# Altium PCB PDB_first.PcbDoc
Units mm, origin at the board's own origin, x right, y up, seen from the top; angles counter-clockwise.
Board outline 170.31 x 111.51 mm, 2 copper layers (Top Layer, Bottom Layer); 59 components, 41 nets, 170 pads, 167 vias.
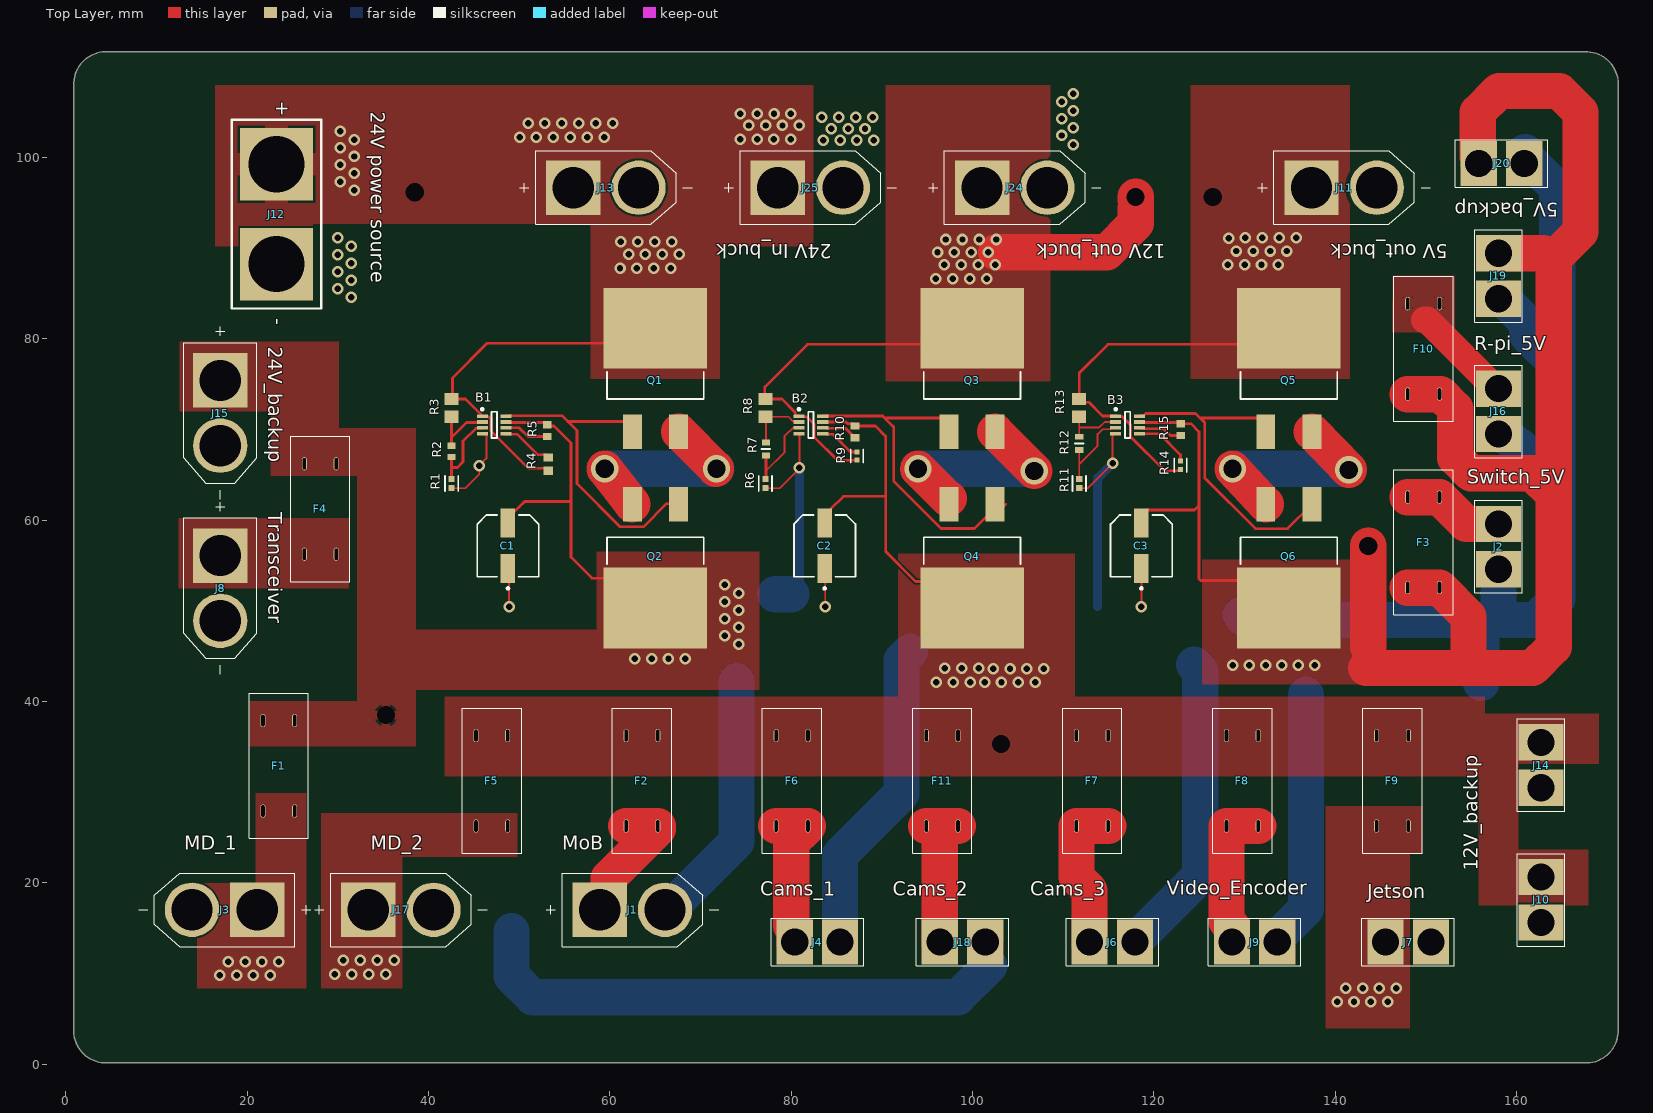
[diagram p0: Top Layer view]
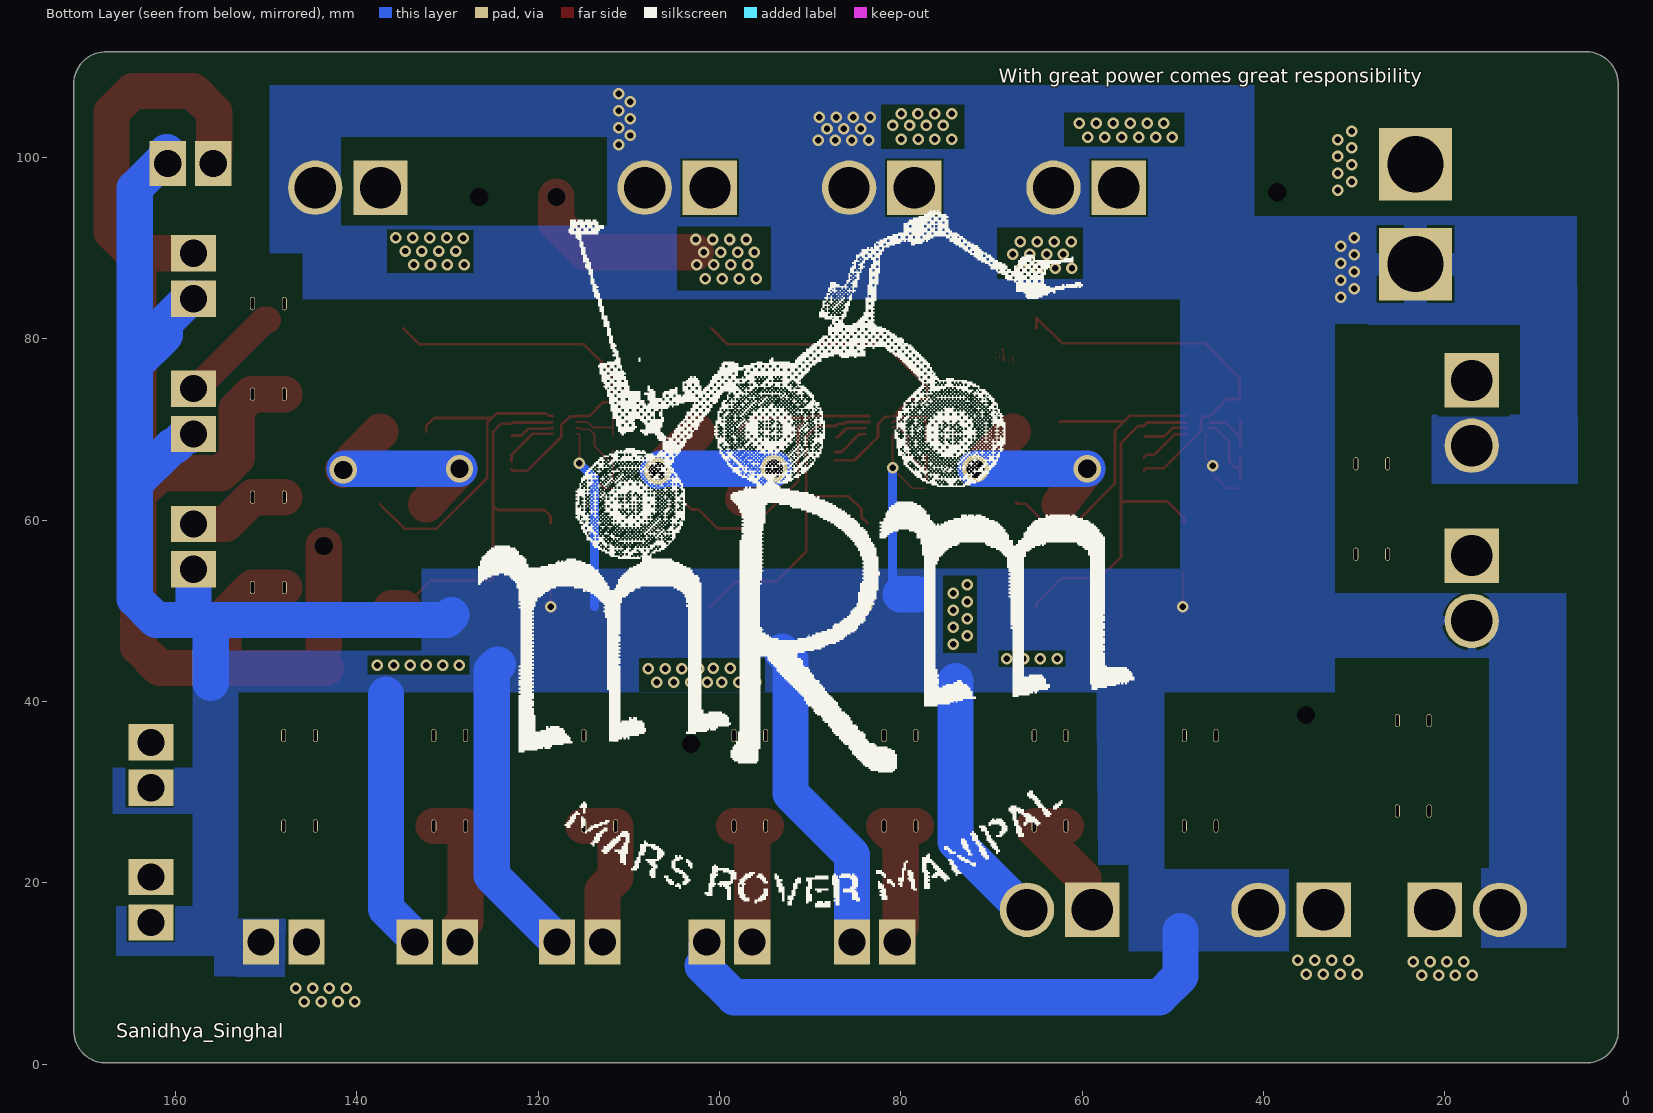
[diagram p1: Bottom Layer view, seen from below]
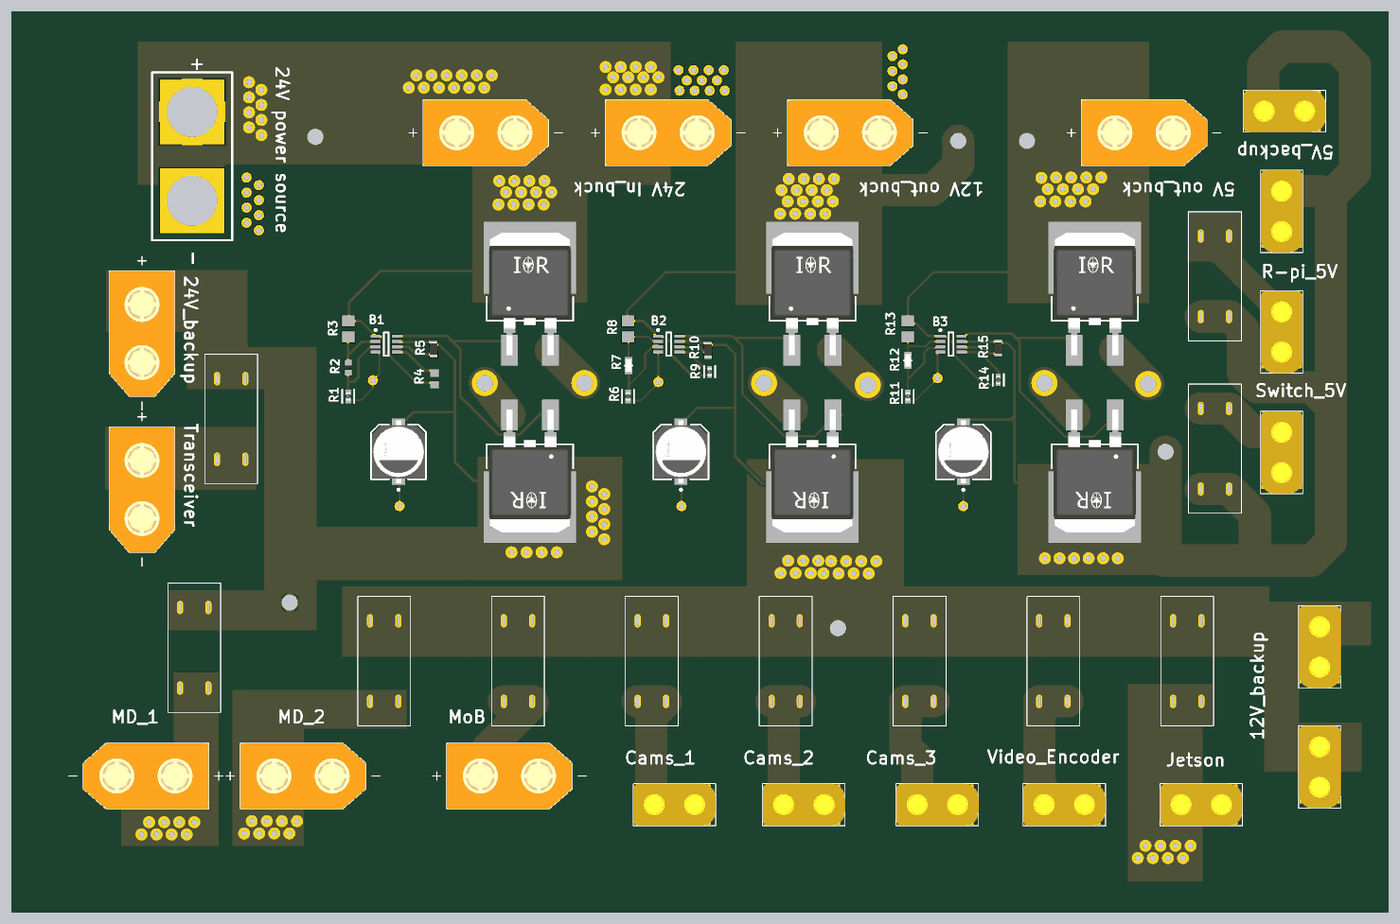
[diagram p2: 3D render of the assembled board from above, using the file's embedded part models]

## Layer stack, top to bottom
Top Solder: solder mask 0.0102, Solder Resist, Dk 3.5
Top Layer: signal copper 0.0356
Dielectric 1: dielectric 0.32, FR-4, Dk 4.8
Bottom Layer: signal copper 0.0356
Bottom Solder: solder mask 0.0102, Solder Resist, Dk 3.5

## Board outline
0.887,3.554 ccw(c4.443,3.681) 4.259,0.127 167.894,0.127 167.769,0.129 ccw(c167.642,3.685) 171.196,3.502 171.196,108.331 171.198,108.206 ccw(c167.642,108.079) 167.826,111.633 4.318,111.633 ccw(c4.445,108.077) 0.891,108.261 0.887,108.256

## Design rules (kind name [scope] priority, off if disabled: settings)
Clearance [All] p1: gap=0.2 ignorepadtopadclearanceinfootprint=FALSE
PlaneClearance [All] p1: clearance=2
PlaneConnect [All] p1: planeconnectstyle=Direct reliefexpansion=0.508 reliefentries=4 reliefconductorwidth=0.254 reliefairgap=1
PolygonConnect [All] p1: connectstyle=Direct reliefconductorwidth=1 reliefentries=4 polygonreliefangle="90 Angle" airgapwidth=0.254
RoutingTopology [All] p1: topology=Daisy_Balanced
RoutingVias [All] p1: holewidth=0.711 width=1.27 viastyle="Through Hole" minholewidth=0.711 minwidth=1.27 maxholewidth=0.711 maxwidth=1.27
SolderMaskExpansion [All] p1: expansion=0.102 istentingtop=FALSE
SupplyNets "Schematic Supply Nets_2" [InNet('VCC')] p1: voltage=0.000
SupplyNets "Schematic Supply Nets_1" [InNet('+5')] p2: voltage=0.000
SupplyNets "Schematic Supply Nets_3" [InNet('+12')] p3: voltage=0.000
SupplyNets "Schematic Supply Nets" [InNet('GND')] p4: voltage=0.000
Width [All] p1: maxlimit=20 minlimit=0.05 preferedwidth=5 minimp=50.000000 maximp=50.000000 favimp=50.000000
27 further rules are at their usual default settings.

## Classes and differential pairs
component class PDB_first: B1 B2 B3 C1 C2 C3 F1 F2 F3 F4 F5 F6 F7 F8 F9 F10 F11 F? J1 J2 J3 J4 J6 J7 J8 J9 J10 J11 J12 J14 J15 J16 J17 J18 J19 J20 J24 J25 Q1 Q2 Q3 Q4 Q5 Q6 R1 R3 R4 R5 R6 R8 R9 R10 R11 R13 R14 R15

## Components (designator, comment, footprint, x,y, rotation, side; value= is the part's Value field where it differs from the comment)
B1 "LTC4365ITS8#TRMPBF" LT-TS8-8-TSOT-23_V 47.245,70.485 r0 top
B2 "LTC4365ITS8#TRMPBF" LT-TS8-8-TSOT-23_V 82.17,70.485 r0 top
B3 "LTC4365ITS8#TRMPBF" LT-TS8-8-TSOT-23_V 117.094,70.485 r0 top
C1 "EEEFT1V101AP" FP-FTD-MFG 48.769,57.15 r90 top
C2 "EEEFT1V101AP" FP-FTD-MFG 83.694,57.15 r90 top
C3 "EEEFT1V101AP" FP-FTD-MFG 118.618,57.15 r90 top
F1 "MicroBladeFuseHolder" Fuse 23.495,32.893 r0 top
F2 "MicroBladeFuseHolder" Fuse 63.542,31.242 r0 top
F3 "MicroBladeFuseHolder" Fuse 149.733,57.531 r180 top
F4 "MicroBladeFuseHolder" Fuse 28.067,61.214 r0 top
F5 "MicroBladeFuseHolder" Fuse 46.99,31.242 r0 top
F6 "MicroBladeFuseHolder" Fuse 80.095,31.242 r0 top
F7 "MicroBladeFuseHolder" Fuse 113.199,31.242 r0 top
F8 "MicroBladeFuseHolder" Fuse 129.752,31.242 r0 top
F9 "MicroBladeFuseHolder" Fuse 146.304,31.242 r0 top
F10 "MicroBladeFuseHolder" Fuse 149.733,78.867 r180 top
F11 "MicroBladeFuseHolder" Fuse 96.647,31.242 r0 top
J1 "XT60-M" AMASS_XT60-M#1 62.484,17.018 r0 top
J2 "XT30PB" XT30PB 157.988,59.563 r0 top
J3 "XT60-M" AMASS_XT60-M#1 17.526,17.018 r180 top
J4 "XT30PB" XT30PB 80.391,13.462 r90 top
J6 "XT30PB" XT30PB 112.903,13.462 r90 top
J7 "XT30PB" XT30PB 145.542,13.462 r90 top
J8 "XT60-M" AMASS_XT60-M#1 17.039,52.478 r270 top
J9 "XT30PB" XT30PB 128.604,13.462 r90 top
J10 "XT30PB" XT30PB 162.687,20.621 r0 top
J11 "XT60-M" AMASS_XT60-M#1 140.97,96.647 r0 top
J12 "xt90" xt90 23.241,93.726 r270 top
J13 "XT60-M" AMASS_XT60-M#1 59.563,96.647 r0 top
J14 "XT30PB" XT30PB 162.687,35.48 r0 top
J15 "XT60-M" AMASS_XT60-M#1 17.039,71.795 r270 top
J16 "XT30PB" XT30PB 157.988,74.486 r0 top
J17 "XT60-M" AMASS_XT60-M#1 36.957,17.018 r0 top
J18 "XT30PB" XT30PB 96.393,13.462 r90 top
J19 "XT30PB" XT30PB 157.988,89.408 r0 top
J20 "XT30PB" XT30PB 155.829,99.314 r90 top
J24 "XT60-M" AMASS_XT60-M#1 104.648,96.647 r0 top
J25 "XT60-M" AMASS_XT60-M#2 82.105,96.647 r0 top
Q1 "IRLZ44NSTRLPBF" FP-PG-TO263-3-MFG 65.024,76.708 r0 top
Q2 "IRLZ44NSTRLPBF" FP-PG-TO263-3-MFG 65.024,54.737 r180 top
Q3 "IRLZ44NSTRLPBF" FP-PG-TO263-3-MFG 99.949,76.708 r0 top
Q4 "IRLZ44NSTRLPBF" FP-PG-TO263-3-MFG 99.949,54.737 r180 top
Q5 "IRLZ44NSTRLPBF" FP-PG-TO263-3-MFG 134.874,76.708 r0 top
Q6 "IRLZ44NSTRLPBF" FP-PG-TO263-3-MFG 134.874,54.737 r180 top
R1 "5.9K" FP-ERJ2RK-IPC_A 42.545,64.008 r270 top
R2 "4.02K" RESC1608X55X30LL15T15 42.545,67.564 r90 top
R3 "300K" RESC2013X70X40ML20T20 42.545,72.357 r90 top
R4 "100K" RESC1608X55X30ML15T15 53.214,66.163 r270 top
R5 "CRCW060310K0FKEA" RESC1609X50X30NL8T20 53.086,69.85 r90 top
R6 "5.9K" FP-ERJ2RK-IPC_A 77.153,64.008 r270 top
R7 "ERJ-3EKF6042V" FP-ERJ3EK-MFG 77.216,67.818 r270 top
R8 "300K" RESC2013X70X40ML20T20 77.153,72.357 r90 top
R9 "ERJ-2RKF5103X" FP-ERJ2RK-IPC_B 87.249,67.056 r270 top
R10 "CRCW060310K0FKEA" RESC1609X50X30NL8T20 87.039,69.723 r90 top
R11 "5.9K" FP-ERJ2RK-IPC_A 111.76,64.008 r270 top
R12 "ERJ-3EKF6042V" FP-ERJ3EK-MFG 111.76,68.453 r270 top
R13 "300K" RESC2013X70X40ML20T20 111.76,72.357 r90 top
R14 "ERJ-2RKF5103X" FP-ERJ2RK-IPC_B 122.936,66.04 r270 top
R15 "CRCW060310K0FKEA" RESC1609X50X30NL8T20 122.936,69.977 r90 top

## Footprints (in the part's own frame and the unit in brackets; to place one, negate y for a bottom-side part, rotate by r counter-clockwise, add the part's x,y. Pads: shape width x height; smd on the part's side, far side on the other; paste and mask are expansions set on the pad)
AMASS_XT60-M#1 [mm]
  round 6 hole 4.55: N(3.6,0)
  rect 6x6 / inner round 6 / far side rect 6x6 hole 4.55: P(-3.6,0)
  silkscreen extent -9.5,-4.05 9.5,4.05, body extent -7.75,-4.05 7.75,4.05, height 16
AMASS_XT60-M#2 [mm]
  round 6 hole 4.55: N(3.6,0)
  rect 6x6 hole 4.55: P(-3.6,0)
  silkscreen extent -9.5,-4.05 9.5,4.05, body extent -7.75,-4.05 7.75,4.05, height 16
FP-ERJ2RK-IPC_A [mm]
  rect 0.668x0.672 smd paste+0 mask+0: 1(-0.502,0) 2(0.502,0)
  silkscreen extent -0.84,-0.74 0.84,0.74, body extent -1.04,-0.54 1.04,0.54, height 0.25
FP-ERJ2RK-IPC_B [mm]
  rect 0.568x0.572 smd paste+0 mask+0: 1(-0.452,0) 2(0.452,0)
  silkscreen extent -0.74,-0.69 0.74,0.69, body extent -0.89,-0.44 0.89,0.44, height 0.25
FP-ERJ3EK-MFG [mm]
  rect 0.65x0.9 smd paste+0 mask+0: 1(-0.725,0) 2(0.725,0)
  silkscreen extent 0,-0.48 0,0.48, body extent -1.15,-0.58 1.15,0.58, height 0.25
FP-FTD-MFG [mm]
  rect 3.2x1.6 smd paste+0 mask+0: 1(-2.5,0) 2(2.5,0)
  silkscreen extent -4.82,-3.4 3.4,3.4, body extent -4.35,-3.65 4.35,3.65, height 0.25
FP-PG-TO263-3-MFG [mm]
  rect 2.08x3.81 smd paste+0 mask+0: 1(-2.54,-6.985) 3(2.54,-6.985)
  rect 11.43x8.89 smd paste+0 mask+0: 4(0,4.445)
  silkscreen extent -5.34,-3.36 5.34,-0.38, body extent -5.81,-8.99 5.81,8.99, height 0.25
Fuse [mm] "MicroBladeFuseHolder"
  oval 0.55x1.455 hole 0.35 slot 1.255 at 90 deg: 0(-1.75,4.988) 0(1.75,4.988) 1(-1.75,-4.988) 1(1.75,-4.988)
  silkscreen extent -3.27,-8 3.27,8
LT-TS8-8-TSOT-23_V [mm] "SOT23, 8-Leads, Body 2.9x1.75mm, Pitch 0.65mm"
  rect 1.22x0.4 smd: 1(-1.31,0.975) 2(-1.31,0.325) 3(-1.31,-0.325) 4(-1.31,-0.975) 5(1.31,-0.975) 6(1.31,-0.325) 7(1.31,0.325) 8(1.31,0.975)
  silkscreen extent -1.43,-1.45 0.3,1.85, body extent -0.87,-1.45 0.88,1.45, height 1
RESC1608X55X30LL15T15 [mm] "Chip Resistor, 2-Leads, Body 1.60x0.80mm, IPC High Density"
  rect 0.7x0.85 smd: 1(-0.625,0) 2(0.625,0)
  body extent -0.87,-0.48 0.87,0.48, height 0.55
RESC1608X55X30ML15T15 [mm] "Chip Resistor, 2-Leads, Body 1.60x0.80mm, IPC Low Density"
  rect 0.9x1.05 smd: 1(-0.725,0) 2(0.725,0)
  body extent -0.87,-0.48 0.87,0.48, height 0.55
RESC1609X50X30NL8T20 [mm] "Chip Resistor, 2-Leads, Body 1.65x0.95mm, IPC Medium Density"
  rect 0.8x0.95 smd: 1(-0.65,0) 2(0.65,0)
  body extent -0.82,-0.48 0.82,0.48, height 0.5
RESC2013X70X40ML20T20 [mm] "Chip Resistor, 2-Leads, Body 2.00x1.25mm, IPC Low Density"
  rect 1.35x1.55 smd: 1(-0.975,0) 2(0.975,0)
  body extent -1.1,-0.72 1.1,0.72, height 0.7
XT30PB [mm]
  rect 5x4 hole 3: 1(0,0) 2(0,-5)
  silkscreen extent -2.6,-7.6 2.6,2.6, body extent -2.6,-7.6 2.6,2.6, height 10.66
xt90 [mm]
  rect 8x8 hole 6.2: 1(-5.5,0) 2(5.5,0)
  silkscreen extent -10.4,-4.95 10.4,4.95

## Part data
B1 B2 B3: library part CMP-0474-00861-1, "UV, OV and Reverse Supply Protection Controller, 2.5 to 34 V Vin, 8-pin SOT23 (TS8-8), -40 to 85 degC, Pb-Free, Mini Tape and Reel", Extended Temp="C, I, H", Manufacturer="Linear Technology", Power Good=no, Active Limiting=no, Circuit Breakers(#)=1, Code_JEDEC=MO-193, ComponentLink1Description="Manufacturer URL", ComponentLink1URL=http://www.linear.com/, ComponentLink2Description=Datasheet, ComponentLink2URL=http://cds.linear.com/docs/en/datasheet/4365f.pdf, ComponentLink3Description="Package Specification", ComponentLink3URL=http://cds.linear.com/docs/en/packaging/SOT_8_05-08-1637.pdf, Fast Comparator=no, Fault=yes, Foldback=no, Mounting Technology="Surface Mount", PackageDescription="8-Pin Plastic TSOT-23, Body 2.9 x 1.63 mm, Pitch 0.65 mm", PackageReference=TS8-8, PackageVersion="Rev. A, 08/2010", Packing="Mini Tape and Reel", PartNumber=LTC4365ITS8#TRMPBF, Reset=no, RoHS=TRUE, Vin Range="2.5 to 34 V"
C1 C2 C3: library part CMP-05427-000027-1, "CAP ALUM 100UF 20% 35V SMD", Capacitance=100uF, Case/Package=Radial, ESR (Equivalent Series Resistance)=260mR, Leakage Current=35uA, Max Operating Temperature=105°C, Min Operating Temperature=-55°C, Package Quantity=1000, Ripple Current=300mA, Tolerance=20%, Voltage=35V, Construction=Cylindrical, Contact Plating=Tin, Diameter=6.3mm, Height=5.8mm, Height - Seated (Max)=0.24inch, Lead Diameter=0.65mm, Lead Pitch=1.8mm, Length=5.8mm, Life (Hours)=2000Hour, Mount="Surface Mount", Number of Pins=2, Packaging="Tape and Reel", Polarity=Polar, Radiation Hardening=No, REACH SVHC="No SVHC", Ripple Current (AC)=300mA, RoHS Compliant=Yes, Series=FT, Termination=SMD/SMT, Voltage Rating=35V, Voltage Rating (DC)=35V
J1 J3 J8 J11 J13 J17 J24 J25: "Plug; DC supply; XT60; male; PIN: 2; for cable; soldered; 30A; 500V", Package=Package, Check_prices=https://www.snapeda.com/parts/XT60-M/AMASS/view-part/?ref=eda, MF=AMASS, MP=XT60-M, SnapEDA_Link=https://www.snapeda.com/parts/XT60-M/AMASS/view-part/?ref=snap
  J1 J3 J8 J11 J13 J17: Availability="Not in stock", Price=None
J2 J4 J6 J7 J9 J10 J14 J16 J18: "Connector", Manufacturer_Name=Amass, Datasheet Link=https://www.tme.eu/Document/4acc913878197f8c2e30d4b8cdc47230/XT30UPB%20SPEC.pdf, Height=10.7mm, Manufacturer_Part_Number=XT30PB
J15: "24V backup", Package=Package, Availability="Not in stock", Check_prices=https://www.snapeda.com/parts/XT60-M/AMASS/view-part/?ref=eda, MF=AMASS, MP=XT60-M, Price=None, SnapEDA_Link=https://www.snapeda.com/parts/XT60-M/AMASS/view-part/?ref=snap
J19: "12V backup", Manufacturer_Name=Amass, Datasheet Link=https://www.tme.eu/Document/4acc913878197f8c2e30d4b8cdc47230/XT30UPB%20SPEC.pdf, Height=10.7mm, Manufacturer_Part_Number=XT30PB
J20: "24V backup", Manufacturer_Name=Amass, Datasheet Link=https://www.tme.eu/Document/4acc913878197f8c2e30d4b8cdc47230/XT30UPB%20SPEC.pdf, Height=10.7mm, Manufacturer_Part_Number=XT30PB
Q1 Q2 Q3 Q4 Q5 Q6: library part CMP-32901-000495-1, "MOSFET N-CH 55V 47A D2PAK", Case/Package=D2PAK, Continuous Drain Current (ID)=47A, Drain to Source Breakdown Voltage=55V, Drain to Source Resistance=35mR, Gate to Source Voltage (Vgs)=16V, Input Capacitance=1.7nF, Max Operating Temperature=175°C, Max Power Dissipation=3.8W, Min Operating Temperature=-55°C, Power Dissipation=110W, Threshold Voltage=2V, Drain to Source Voltage (Vdss)=55V, Element Configuration=Single, Halogen Free="Halogen Free", Height=0.19inch, Lead Free="Contains Lead", Length=0.42inch, Max Dual Supply Voltage=55V, Mount="Surface Mount", Number of Pins=3, Packaging="Tape and Reel", Rds On Max=22mR, REACH SVHC="No SVHC", RoHS Compliant=Yes, Turn-Off Delay Time=26ns, Turn-On Delay Time=11ns, Width=0.38inch
R1 R6 R11: library part CMP-2002-01005-2, "RES SMD 5.9K OHM 1% 1/10W 0402", Case Code (Imperial)=0402, Case Code (Metric)=1005, Max Operating Temperature=155°C, Max Power Dissipation=100mW, Min Operating Temperature=-55°C, Package Quantity=1, Resistance=5.9kR, Resistance Tolerance=1%, Resistor Type="Thick Film", Temperature Coefficient=100ppm/°C, Voltage Rating=50V, Case/Package=0402, Construction=Rectangular, Contact Plating=Tin, Depth=0.5mm, Features="Automotive AEC-Q200", Height=0.016inch, Lead Free="Lead Free", Length=1mm, Military Standard=Not, Mount="Surface Mount", Number of Terminations=2, Packaging="Tape and Reel", Power Rating=100mW, RoHS Compliant=Yes, Series=ERJ, Termination=SMD/SMT, Tolerance=1%, Voltage Rating (DC)=50V, Width=0.02inch
R2: library part CMP-1012-00578-2, Manufacturer=Panasonic, Part Number=ERJ-3EKF4021V
R3 R8 R13: library part CMP-2001-00397-1, Manufacturer=Panasonic, Part Number=ERJ-6GEYJ304V
R4: library part CMP-2000-00182-1, Manufacturer=Panasonic, Part Number=ERJ-3EKF1003V
R5 R10 R15: library part CMP-1666-00005-4, "Chip Resistor, 10 KOhm, +/- 1%, 100 mW, -55 to 155 degC, 0603 (1608 Metric), RoHS, Tape and Reel", Manufacturer="Vishay Semiconductor", Max Operating Temperature="155 degC", Min Operating Temperature="-55 degC", Package Quantity=5000, Voltage Rating="75 V", ComponentLink1Description="Manufacturer URL", ComponentLink1URL=http://www.vishay.com/, ComponentLink2Description=Datasheet, ComponentLink2URL=https://datasheet.ciiva.com/11809/0900766b80d98afc-11809037.pdf, DatasheetVersion=06/2012, Height="0.45 mm", Length="1.55 mm", Mounting Technology="Surface Mount", PackageDescription="2-Pin Surface Mount Device, Body 1.575 x 0.85 mm", PackageReference=0603, Packaging="Tape and Reel", REACH SVHC=Unknown, RoHSCompliant=true
R7 R12: library part CMP-1012-00711-3, Case Code (Imperial)=0603, Case Code (Metric)=1608, Max Operating Temperature=155°C, Max Power Dissipation=100mW, Min Operating Temperature=-55°C, Resistance=60.4kΩ, Temperature Coefficient=100ppm/°C, Tolerance=1%, Voltage Rating=75V, Voltage Rating (DC)=50V, Case/Package=0603, Composition="Thick Film", Contact Plating=Tin, Depth=800µm, Height=550µm, Lead Free="Lead Free", Length=1.6mm, Lifecycle Status=Production, Military Standard=Not, Mount="Surface Mount", NexarPartId=55421854, Number of Terminations=2, Packaging="Cut Tape", Power Rating=100mW, Radiation Hardening=No, REACH SVHC="No SVHC", RoHS=Compliant, Schedule B="8533210045, 8533210045", Termination=SMD/SMT, Width=787.4µm
R9 R14: library part CMP-2002-00972-2, "RES SMD 510K OHM 1% 1/10W 0402", Case Code (Imperial)=0402, Case Code (Metric)=1005, Max Operating Temperature=155°C, Max Power Dissipation=100mW, Min Operating Temperature=-55°C, Package Quantity=10000, Resistance=510kR, Resistance Tolerance=1%, Resistor Type="Thick Film", Temperature Coefficient=100ppm/°C, Voltage Rating=50V, Case/Package=0402, Construction=Rectangular, Contact Plating=Tin, Depth=0.5mm, Height=0.35mm, Lead Free="Lead Free", Length=1mm, Military Standard=Not, Mount="Surface Mount", Number of Terminations=2, Packaging="Tape and Reel", Power Rating=100mW, Radiation Hardening=No, REACH SVHC="No SVHC", RoHS Compliant=Yes, Series=ERJ, Technology="THICK FILM", Termination=SMD/SMT, Tolerance=1%, Voltage Rating (DC)=50V, Width=0.02inch

## Free pads (board coordinates)
  round 1.524 hole 2: 15(35.306,38.481) 15(38.481,96.139) 15(103.124,35.306) 15(117.983,95.631) 15(126.492,95.631) 15(143.637,57.15)

## Via types
v1: diameter 1.27, hole 0.711, Top Layer to Bottom Layer, 161 vias
v2: diameter 3, hole 2, Top Layer to Bottom Layer, 6 vias

## Nets (pads, with @x,y where several pads share a name; then routed paths per layer and width w, separated by ;. In a path a pad name is that pad's centre, name@x,y a point inside that pad or via, vN(x,y) a via of type N, cw(c..) or ccw(c..) an arc to the next point about the centre after c; other vN are vias at no path point)
+5: 
+12: 
GND: B1.4 B2.4 B3.4 C1.1 C2.1 C3.1 J1.N J2.2 J3.N J4.2 J6.2 J7.2 J8.N J9.2 J11.N J12.2 J13.N J15.N J16.2 J17.N J18.2 J19.2 J20.2 J24.N J25.N R1.2 R6.2 R11.2 | length 378.3
  Top Layer w0.2: R1.2@42.504,63.508 44.077,63.508 45.594,65.025 v1(45.594,66.003) 46.385,66.794 46.385,69.41 B1.4@45.935,69.41 ; C1.1@48.769,54.392 48.895,54.266 v1(48.895,50.419) ; R6.2@77.343,63.506 78.746,63.506 80.899,65.659 v1(80.899,65.786) 80.899,69.469 B2.4@80.927,69.497 ; v1(83.757,50.419) C2.1@83.757,53.75 ; R11.2 112.688,63.506 v1(115.443,66.261) 115.443,69.41 115.543,69.51 B3.4 ; v1(118.618,50.419) C3.1
  Bottom Layer w1: 80.01,51.816 80.899,52.705 v1(80.899,65.786) ; 113.792,50.466 113.792,64.61 v1(115.443,66.261)
  Bottom Layer w4: 49.149,14.647 49.149,9.709 51.492,7.366 98.369,7.366 101.854,10.851 101.393,11.312 J18.2@101.393,13.208 ; J1.N@66.084,16.637 73.958,24.511 73.958,42.23 ; 78.232,51.816 80.01,51.816 ; J4.2@85.391,13.208 J4.2 85.391,23.068 92.168,29.845 92.168,44.543 93.091,45.466 ; J6.2@117.903,13.081 J6.2 117.903,13.581 125.119,20.796 125.119,43.41 124.46,44.069 ; 129.54,49.53 130.09,48.98 156.083,48.98 ; J9.2 133.604,13.962 136.779,17.137 136.779,40.767 ; J11.N@144.227,96.647 J11.N J11.N@144.57,96.106 ; 156.083,42.037 156.083,48.98 ; J2.2 157.988,48.98 ; J19.2 158.488,84.408 161.138,81.758 161.138,80.408 164.465,77.081 ; J16.2@158.369,69.342 158.869,69.342 160.09,68.121 160.352,68.121 164.465,64.008 ; J20.2@160.956,100.584 160.956,100.084 164.465,96.575 164.465,77.081 ; 156.083,48.98 157.988,48.98 ; 157.988,48.98 162.122,48.98 164.465,51.324 164.465,64.008 ; 164.465,64.008 164.465,77.081
  other v1: 31.496,84.571 29.972,85.512 31.496,86.435 29.972,87.376 31.496,88.3 29.972,89.24 31.496,90.164 29.972,91.105 111.125,101.387 83.52,101.854 85.385,101.854 87.249,101.854 89.113,101.854 109.855,102.403 84.409,103.124 86.274,103.124 88.138,103.124 111.125,103.251 109.855,104.267 83.393,104.394 85.258,104.394 87.122,104.394 88.986,104.394 111.125,105.115 109.855,106.131 111.125,106.98
NetB1_1: B1.1 J12.1 J13.P J25.P pad.15@38.481,96.139 Q1.4 R3.2 R4.2 | length 43.3
  Top Layer w0.3: R3.2 R3.2@42.645,73.332 ; B1.1@45.935,71.41 46.521,71.41 46.571,71.36 46.69,71.36 46.895,71.155 46.895,69.818 51.021,65.692 52.96,65.692 R4.2 ; B1.1 44.063,73.332 R3.2@42.645,73.332 ; Q1.4 65.024,82.296 62.23,79.502 46.482,79.502 42.645,75.665 R3.2@42.645,73.332
  other v1: 61.122,87.757 62.986,87.757 64.851,87.757 66.715,87.757 62.062,89.281 63.927,89.281 65.791,89.281 67.656,89.281 61.214,90.678 63.078,90.678 64.943,90.678 66.807,90.678 31.798,96.358 30.274,97.298 31.798,98.222 30.274,99.163 31.798,100.087 30.274,101.027 31.798,101.951 74.37,101.981 76.234,101.981 78.099,101.981 79.963,101.981 50.041,102.22 51.906,102.22 53.77,102.22 55.635,102.22 57.499,102.22 59.364,102.22 30.274,102.892 75.31,103.505 77.175,103.505 79.039,103.505 80.904,103.505 50.982,103.744 52.846,103.744 54.711,103.744 56.575,103.744 58.44,103.744 60.304,103.744 74.376,104.775 76.241,104.775 78.105,104.775 79.969,104.775
NetB1_2: B1.2 R2.2 R3.1 | length 6.9
  Top Layer w0.3: R2.2 42.545,69.088 ; R3.1@42.545,71.034 42.545,69.088 ; B1.2@45.935,70.76 44.217,70.76 42.545,69.088
NetB1_3: B1.3 R1.1 R2.1 | length 9
  Top Layer w0.3: R1.1 42.545,65.786 ; R2.1 42.545,65.786 ; B1.3 45.885,70.11 45.23,70.11 43.815,68.695 43.815,66.421 43.18,65.786 42.545,65.786
NetB1_5: B1.5 R4.1 | length 5.8
  Top Layer w0.3: B1.5@48.482,69.469 49.784,69.469 52.065,67.188 52.914,67.188 R4.1
NetB1_6: B1.6 R5.1 | length 4.9
  Top Layer w0.3: B1.6 50.013,70.16 50.973,69.2 R5.1
NetB1_7: B1.7 C1.2 F1.0 F4.0 J15.P pad.15@35.306,38.481 Q2.4 R5.2 | length 41
  Top Layer w0.3: B1.7@48.555,70.76 B1.7@48.605,70.76 ; B1.7 B1.7@48.605,70.76 ; C1.2 48.769,60.192 49.992,61.415 49.992,61.417 50.62,62.045 55.726,62.045 ; Q2.4 Q2.4 65.025,50.796 62.231,53.59 58.04,53.59 55.726,55.904 55.726,62.045 ; B1.7@48.605,70.76 48.753,70.76 48.753,70.75 52.836,70.75 R5.2 53.215,70.371 53.835,70.371 55.726,68.48 55.726,62.045
  other v1: 62.738,44.704 64.602,44.704 66.467,44.704 68.331,44.704 74.216,46.32 72.692,47.26 74.216,48.184 72.692,49.125 74.216,50.049 72.692,50.989 74.216,51.913 72.692,52.854
NetB1_8: B1.8 Q1.1 Q2.1 | length 35.5
  Top Layer w0.3: B1.8 48.605,71.51 54.725,71.51 55.369,70.866 ; Q1.1@62.484,70.866 55.369,70.866 ; Q2.1@67.272,61.933 67.145,61.806 66.251,61.806 63.69,59.245 61.151,59.245 56.388,64.008 56.388,69.847 55.369,70.866
NetB2_1: B2.1 J24.P pad.15@117.983,95.631 Q3.4 R8.2 R9.2 | length 60.9
  Top Layer w0.3: R8.2@77.089,73.332 77.089,74.676 81.788,79.375 99.123,79.375 Q3.4@100.901,81.153 ; R8.2 78.988,73.332 80.436,71.883 80.436,71.51 80.486,71.46 B2.1 ; B2.1@81.28,71.374 81.727,71.374 82.52,70.581 82.52,69.165 85.081,66.604 R9.2
  Top Layer w4: 102.616,89.535 114.808,89.535 118.009,92.736 118.009,94.437 pad.15@117.983,95.631
  other v1: 95.955,86.614 97.819,86.614 99.684,86.614 101.548,86.614 96.896,88.138 98.76,88.138 100.625,88.138 102.489,88.138 96.134,89.535 97.998,89.535 99.863,89.535 101.727,89.535 97.023,90.932 98.887,90.932 100.752,90.932 102.616,90.932
NetB2_2: B2.2 R7.1 R8.1 | length 7.4
  Top Layer w0.2: R7.1 77.216,70.807 77.219,70.81 77.5,70.81 77.153,71.158 R8.1 79.703,71.382 80.175,70.91 80.76,70.91 B2.2 B2.2@80.977,70.693
NetB2_3: B2.3 R6.1 R7.2 | length 10
  Top Layer w0.2: R6.1 77.089,64.447 77.089,64.262 R6.1@77.245,64.418 ; 77.216,65.405 79.248,67.437 79.248,69.215 80.326,70.293 80.9,70.293 80.9,70.201 B2.3
  Top Layer w0.3: R6.1 77.216,64.574 77.216,65.405 R7.2
NetB2_5: B2.5 R9.1 | length 4.2
  Top Layer w0.3: B2.5@83.91,69.469 84.582,69.469 86.543,67.508 R9.1
NetB2_6: B2.6 R10.1 | length 3.6
  Top Layer w0.3: B2.6@83.947,70.104 86.016,70.104 87.047,69.073 R10.1@87.122,69.073
NetB2_7: B2.7 C2.2 F2.0 F5.0 F6.0 F7.0 F8.0 F9.0 F11.0 J10.1 J14.1 pad.15@103.124,35.306 Q4.4 R10.2 | length 42
  Top Layer w0.3: B2.7 86.047,70.81 86.234,70.623 86.872,70.623 87.122,70.373 89.281,70.373 90.424,69.23 90.424,62.611 ; C2.2 84.344,60.3 84.344,61.2 85.755,62.611 90.424,62.611 ; Q4.4@101.092,50.292 98.171,53.213 93.726,53.213 90.424,56.515 90.424,62.611
  other v1: 101.324,42.085 103.189,42.085 105.053,42.085 106.918,42.085 96.013,42.133 97.877,42.133 99.742,42.133 102.265,43.609 104.129,43.609 105.994,43.609 107.858,43.609 96.953,43.657 98.818,43.657 100.682,43.657
NetB2_8: B2.8 Q3.1 Q4.1 | length 38.1
  Top Layer w0.3: B2.8 90.084,71.46 90.297,71.247 ; Q3.1@97.662,69.719 97.662,70.104 96.519,71.247 90.297,71.247 ; 103.632,61.722 103.08,61.17 102.318,61.17 100.203,59.055 96.52,59.055 91.313,64.262 91.313,70.231 90.849,70.695 90.297,71.247
NetB3_1: B3.1 J11.P pad.15@126.492,95.631 Q5.4 R13.2 R14.2 | length 44.7
  Top Layer w0.3: R14.2 122.802,65.454 122.638,65.454 122.624,65.44 121.169,65.44 117.444,69.165 117.444,70.455 116.489,71.41 115.834,71.41 B3.1 114.341,71.46 112.809,72.992 112.1,72.992 R13.2 111.76,76.2 114.935,79.375 133.096,79.375 Q5.4
  Top Layer w4: J11.P@136.37,95.647 J11.P
  other v1: 128.132,88.138 129.996,88.138 131.861,88.138 133.725,88.138 129.073,89.662 130.937,89.662 132.801,89.662 134.666,89.662 128.27,91.059 130.09,91.103 131.955,91.103 133.819,91.103 135.684,91.103
NetB3_2: B3.2 R12.1 R13.1 | length 6.5
  Top Layer w0.2: R12.1 111.76,70.207 ; R13.1 111.76,70.207 ; B3.2 114.567,70.81 113.964,70.207 111.76,70.207
NetB3_3: B3.3 R11.1 R12.2 | length 9.9
  Top Layer w0.2: R11.1@111.76,64.256 R11.1 111.76,66.136 ; R12.2 111.76,66.136 ; B3.3 115.374,70.16 115.224,70.01 114.333,70.01 113.792,69.469 113.792,68.168 111.76,66.136
NetB3_5: B3.5 R14.1 | length 6.2
  Top Layer w0.3: B3.5 120.609,69.51 122.934,67.185 R14.1@122.934,66.492
NetB3_6: B3.6 R15.1 | length 4.9
  Top Layer w0.3: B3.6 118.454,70.11 118.99,70.11 119.04,70.06 121.075,70.06 121.808,69.327 R15.1
NetB3_7: B3.7 C3.2 F3.0 F10.0 J19.1 J20.1 pad.15@143.637,57.15 Q6.4 R15.2 | length 199.5
  Top Layer w0.3: B3.7 118.454,70.76 122.803,70.76 R15.2 124.064,70.627 124.968,69.723 124.968,61.595 ; C3.2 118.618,60.45 119.268,61.1 124.473,61.1 124.968,61.595 ; Q6.4 131.826,53.34 125.144,53.34 124.968,53.516 124.968,61.595
  Top Layer w4: Q6.4 Q6.4@136.144,50.292 ; 143.383,43.688 154.686,43.688 ; 143.637,46.031 pad.15@143.637,57.15 ; F3.0@147.983,52.543 151.483,52.543 154.686,49.34 154.686,43.688 ; F10.0@147.984,73.879 151.483,73.879 151.61,73.879 153.22,72.269 153.22,66.879 154.958,65.142 161.741,65.142 164.084,62.799 ; J20.1 155.829,99.949 155.702,100.076 155.702,104.972 158.045,107.315 164.706,107.315 167.049,104.972 167.049,91.795 164.154,88.9 164.084,88.9 164.084,88.265 ; J19.1 162.941,89.408 164.084,88.265 ; 154.686,43.688 161.741,43.688 164.084,46.031 164.084,62.799 ; 164.084,62.799 164.084,88.265
  other v1: 128.713,43.959 130.513,43.959 132.313,43.959 134.114,43.959 135.914,43.959 137.714,43.959
NetB3_8: B3.8 Q5.1 Q6.1 | length 37.3
  Top Layer w0.3: B3.8 118.454,71.51 118.864,71.51 119.109,71.755 124.587,71.755 125.095,71.247 ; Q5.1 132.334,70.368 131.455,71.247 125.095,71.247 ; Q6.1 134.735,59.043 131.203,59.043 125.603,64.643 125.603,70.739 125.095,71.247
NetF1_1: F1.1 J3.P
  other v1: 16.972,9.779 18.837,9.779 20.701,9.779 22.565,9.779 17.913,11.303 19.777,11.303 21.642,11.303 23.506,11.303
NetF2_1: F2.1 J1.P | length 15.8
  Top Layer w4: J1.P@58.884,16.637 59.884,17.637 59.884,20.514 65.292,25.922 65.292,26.254 F2.1@61.792,26.254
NetF3_1: F3.1 J2.1 | length 11.2
  Top Layer w4: F3.1@147.983,62.519 151.483,62.519 154.439,59.563 J2.1
NetF4_1: F4.1 J8.P
NetF5_1: F5.1 J17.P
  other v1: 29.672,9.906 31.537,9.906 33.401,9.906 35.265,9.906 30.613,11.43 32.477,11.43 34.342,11.43 36.206,11.43
NetF6_1: F6.1 J4.1 | length 17.5
  Top Layer w4: F6.1@78.345,26.254 81.845,26.254 80.01,24.419 80.01,15.261 80.391,14.88 J4.1 J4.1@80.391,13.208
NetF7_1: F7.1 J6.1 | length 17.3
  Top Layer w4: J6.1@112.903,13.081 J6.1 112.903,19.143 111.449,20.597 111.449,26.254 F7.1@114.949,26.254
NetF8_1: F8.1 J9.1 | length 16.1
  Top Layer w4: J9.1@128.604,13.877 128.604,15.134 128.002,15.736 128.002,26.254 F8.1@131.502,26.254
NetF9_1: F9.1 J7.1
  other v1: 140.197,6.858 142.061,6.858 143.926,6.858 145.79,6.858 141.138,8.382 143.002,8.382 144.866,8.382 146.731,8.382
NetF10_1: F10.1 J16.1 | length 11.7
  Top Layer w3: 149.86,82.042 150.169,82.042 157.869,74.342 J16.1@158.369,74.342
NetF11_1: F11.1 J18.1 | length 14.5
  Top Layer w4: F11.1@94.897,26.254 F11.1@98.397,26.254 ; J18.1@96.393,13.208 J18.1 96.393,24.19
NetJ13_P: 
NetJ14_P: 
NetQ1_3: Q1.3 Q2.3 | length 23.2
  Top Layer w3: Q1.3 Q1.3@67.619,69.723 ; v2@71.683,65.659 v2(71.755,65.659)
  Top Layer w4: v2(59.436,65.659) Q2.3 ; Q1.3@67.619,69.723 v2@71.683,65.659
  Bottom Layer w4: v2(59.436,65.659) v2(71.755,65.659)
NetQ3_3: Q3.3 Q4.3 | length 23.8
  Top Layer w4: v2(93.98,65.659) 97.26,62.379 Q4.3@97.409,62.379 ; Q3.3 v2(106.807,65.405)
  Bottom Layer w4: v2(93.98,65.659) 106.553,65.659 v2(106.807,65.405)
NetQ5_3: Q5.3 Q6.3 | length 23.9
  Top Layer w4: v2(128.651,65.659) Q6.3 ; Q5.3 v2(141.478,65.532)
  Bottom Layer w4: v2(128.651,65.659) v2@141.351,65.659
VCC: 
pads on no net: J10.2 J14.2

## Polygon pours and split planes (outlines as drawn)
NetB1_7 on Top Layer "NONET_L01_P-001" (solid, pour order 113): 23.304,79.629 12.573,79.629 12.573,72.009 23.304,72.009
NetB1_7 on Top Layer "NONET_L01_P-001" (solid, pour order 91): 30.099,69.532 30.099,79.629 22.606,79.629 22.606,69.532
NetB3_7 on Top Layer "NONET_L01_P-001" (solid, pour order 164): 125.349,55.626 125.349,41.91 144.653,41.91 144.653,55.626
NetF5_1 on Top Layer "NONET_L01_P-001" (solid, pour order 173): 49.784,27.686 28.194,27.686 28.194,8.382 37.084,8.382 37.084,22.86 49.784,22.86
NetB2_7 on Top Layer "NONET_L01_P-001" (solid, pour order 172): 155.829,34.544 155.829,17.533 167.894,17.533 167.894,23.622 160.147,23.622 160.147,34.417
NetB2_7 on Top Layer "NONET_L01_P-001" (solid, pour order 170): 169.037,33.147 155.702,33.147 155.702,38.608 169.037,38.608
NetF1_1 on Top Layer "NONET_L01_P-001" (solid, pour order 169): 20.955,29.845 26.543,29.845 26.543,8.382 14.478,8.382 14.478,19.939 20.955,19.939
NetB3_1 on Top Layer "NONET_L01_P-001" (solid, pour order 13): 124.079,107.95 124.079,75.565 141.605,75.565 141.605,107.95
NetF9_1 on Top Layer "Top Layer-NetF9_1" (solid, pour order 162): 138.938,3.937 148.209,3.937 148.209,23.242 149.606,23.242 149.606,28.448 138.938,28.448
NetF10_1 on Top Layer "NONET_L01_P-001" (solid, pour order 142): 146.336,86.931 153.162,86.931 153.162,80.709 146.304,80.709 146.304,81.471
NetB2_7 on Top Layer "NONET_L01_P-001" (solid, pour order 153): 41.783,40.513 156.464,40.513 156.464,31.75 41.783,31.75
NetB2_7 on Top Layer "NONET_L01_P-001" (solid, pour order 152): 91.821,56.261 111.252,56.261 111.252,40.005 91.821,40.005
NetB1_7 on Top Layer "Top Layer-NetB1_7" (solid, pour order 45): 20.292,35.052 38.608,35.052 38.608,41.275 58.928,41.275 76.454,41.275 76.454,56.515 58.547,56.515 58.547,47.879 38.608,47.879 38.608,70.104 22.606,70.104 22.606,64.897 32.131,64.897 32.131,40.005 20.292,40.005
NetB2_1 on Top Layer "Top Layer-NetB2_1" (solid, pour order 17): 90.424,75.311 108.585,75.311 108.585,107.95 90.424,107.95
NetB1_1 on Top Layer "Top Layer-NetB1_1" (solid, pour order 81): 72.136,90.191 82.423,90.191 82.423,107.95 16.51,107.95 16.51,90.191 27.258,90.191 27.258,92.69 57.912,92.69 57.912,75.594 72.136,75.594
NetF4_1 on Top Layer "NONET_L01_P-001" (solid, pour order 35): 12.446,60.198 12.446,52.451 31.192,52.451 31.192,60.198
GND on Bottom Layer "NONET_L01_P-001" (solid, pour order 174): 111.379,107.95 111.379,102.235 149.606,102.235 149.606,107.95
GND on Bottom Layer "Bottom Layer-GND 1" (solid, pour order 97): 32.131,41.021 45.72,41.021 132.842,41.021 132.842,54.61 49.203,54.61 49.203,84.328 149.606,84.328 149.606,92.456 149.606,107.95 141.732,107.95 141.732,92.456 112.395,92.456 112.395,107.95 93.853,107.95 93.853,92.456 93.853,107.95 69.469,107.95 69.469,92.456 69.469,107.95 41.021,107.95 41.021,93.472 14.605,93.472 14.605,81.661 32.131,81.661
GND on Bottom Layer "NONET_L01_P-001" (solid, pour order 100): 6.604,12.827 15.113,12.827 15.113,51.943 6.604,51.943
GND on Bottom Layer "NONET_L01_P-001" (solid, pour order 133): 166.878,27.6 156.718,27.6 156.718,32.68 166.878,32.68
GND on Bottom Layer "Bottom Layer-GND" (solid, pour order 141): 147.955,9.652 153.416,9.652 153.416,9.669 155.702,9.669 155.702,11.938 166.497,11.938 166.497,17.399 158.098,17.399 158.098,41.021 158.098,45.593 130.048,45.593 130.048,41.021 153.035,41.021 153.035,21.614 153.035,16.305 153.154,16.308 153.16,16.002 147.828,16.002
GND on Bottom Layer "NONET_L01_P-001" (solid, pour order 122): 5.461,93.472 5.461,81.534 28.426,81.534 28.426,93.472
GND on Bottom Layer "NONET_L01_P-001" (solid, pour order 121): 11.684,92.964 5.461,93.091 5.334,64.008 11.684,64.008
GND on Bottom Layer "NONET_L01_P-001" (solid, pour order 120): 21.463,64.008 21.463,71.628 8.255,71.628 8.255,64.008
GND on Bottom Layer "NONET_L01_P-001" (solid, pour order 116): 52.705,12.446 37.211,12.446 37.211,21.463 52.705,21.463
GND on Bottom Layer "NONET_L01_P-001" (solid, pour order 99): 58.118,12.446 50.927,12.446 50.927,43.688 58.468,43.688
GND on Bottom Layer "NONET_L01_P-001" (solid, pour order 112): 16.002,12.827 16.002,21.59 12.192,21.59 12.192,12.827
GND on Bottom Layer "NONET_L01_P-001" (solid, pour order 98): 12.192,51.943 12.192,44.831 32.385,44.831 32.385,51.943

## Other copper
Top Layer:
  region: 65.685,79.871 65.684,79.862 65.683,79.867 65.684,79.872 65.684,79.873 65.685,79.872
  region: 68.146,77.431 68.145,77.429 68.14,77.428 68.138,77.429 68.138,77.431 68.143,77.433 68.146,77.432
  region: 69.283,78.484 69.285,78.487 69.287,78.485 69.288,78.481 69.287,78.472 69.286,78.47 69.284,78.471 69.282,78.472 69.281,78.477 69.282,78.483
  region: 68.539,78.196 68.536,78.195 68.535,78.199 68.536,78.201 68.54,78.2 68.54,78.197
  region: 69.513,77.69 69.514,77.69 69.514,77.687 69.512,77.686 69.512,77.689
  region: 68.13,77.448 68.128,77.443 68.126,77.439 68.124,77.44 68.124,77.443 68.129,77.453 68.132,77.455 68.134,77.455 68.13,77.449
  region: 69.516,77.665 69.516,77.664 69.512,77.665 69.512,77.667 69.515,77.669 69.516,77.668 69.516,77.667
  region: 69.458,79.047 69.452,79.048 69.451,79.05 69.449,79.051 69.444,79.054 69.445,79.055 69.453,79.057 69.458,79.054 69.461,79.049 69.459,79.047
  region: 69.038,77.576 69.036,77.577 69.037,77.579 69.04,77.578 69.039,77.577
  region: 69.432,79.047 69.434,79.049 69.439,79.051 69.441,79.05 69.44,79.045 69.435,79.042 69.432,79.044 69.431,79.046
  region: 67.706,77.323 67.709,77.326 67.712,77.325 67.714,77.324 67.713,77.318 67.709,77.314 67.704,77.313 67.702,77.314 67.703,77.319 67.705,77.322 67.705,77.323
  region: 68.963,78.963 68.968,78.962 68.973,78.959 68.972,78.957 68.967,78.955 68.946,78.956 68.945,78.958 68.948,78.962 68.953,78.963 68.962,78.963
  region: 69.487,77.661 69.488,77.662 69.488,77.661
  region: 67.712,77.341 67.709,77.338 67.705,77.339 67.702,77.342 67.707,77.348 67.711,77.35 67.712,77.352 67.716,77.36 67.718,77.362 67.72,77.36 67.721,77.355 67.722,77.35 67.721,77.346 67.72,77.345 67.713,77.342 67.712,77.341
  region: 68.652,78.517 68.651,78.517 68.65,78.521 68.649,78.521 68.65,78.526 68.653,78.526 68.655,78.525 68.654,78.521 68.653,78.517
  region: 68.667,77.513 68.669,77.514 68.669,77.516 68.674,77.517 68.682,77.516 68.685,77.513 68.686,77.509 68.685,77.507 68.681,77.506 68.667,77.507 68.666,77.51 68.667,77.512
  region: 67.699,77.364 67.695,77.364 67.694,77.365 67.693,77.37 67.694,77.372 67.695,77.373 67.698,77.374 67.701,77.373 67.702,77.37 67.7,77.365
  region: 67.717,77.408 67.718,77.411 67.719,77.407 67.717,77.404 67.717,77.407
  region: 68.437,78.341 68.432,78.339 68.429,78.34 68.427,78.345 68.428,78.365 68.427,78.368 68.429,78.373 68.432,78.374 68.434,78.372 68.435,78.358 68.438,78.355 68.439,78.351 68.438,78.343 68.437,78.342
  region: 68.464,77.569 68.467,77.569 68.47,77.566 68.471,77.562 68.47,77.546 68.467,77.543 68.462,77.544 68.46,77.545 68.46,77.547 68.459,77.546 68.458,77.549 68.46,77.555 68.461,77.565 68.464,77.568
  region: 69.511,78.961 69.512,78.978 69.512,78.979 69.513,78.958 69.512,78.957 69.511,78.96
  region: 67.72,77.394 67.722,77.389 67.723,77.384 67.725,77.378 67.727,77.376 67.728,77.372 67.727,77.37 67.722,77.368 67.72,77.37 67.719,77.372 67.716,77.375 67.71,77.378 67.708,77.38 67.709,77.385 67.715,77.395 67.716,77.397 67.718,77.4 67.719,77.398 67.72,77.395
  region: 68.865,77.939 68.864,77.932 68.863,77.929 68.867,77.923 68.869,77.916 68.87,77.911 68.872,77.906 68.873,77.902 68.872,77.894 68.871,77.891 68.87,77.874 68.869,77.871 68.868,77.858 68.863,77.853 68.859,77.852 68.85,77.847 68.849,77.846 68.846,77.845 68.842,77.849 68.841,77.857 68.848,77.868 68.849,77.872 68.85,77.904 68.854,77.914 68.856,77.922 68.858,77.928 68.858,77.929 68.855,77.937 68.858,77.942 68.864,77.941 68.865,77.94
  region: 69.121,78.131 69.12,78.126 69.118,78.124 69.117,78.122 69.114,78.122 69.113,78.123 69.114,78.13 69.118,78.135 69.121,78.135 69.121,78.132
  region: 68.153,77.751 68.152,77.746 68.151,77.735 68.15,77.73 68.147,77.726 68.146,77.725 68.138,77.721 68.135,77.722 68.132,77.729 68.131,77.739 68.132,77.742 68.134,77.754 68.135,77.759 68.138,77.762 68.142,77.764 68.148,77.763 68.15,77.761 68.151,77.759 68.154,77.754 68.154,77.752
  region: 68.802,78.021 68.803,78.02 68.802,78.017 68.802,78.003 68.8,78.001 68.798,78.001 68.792,78.002 68.789,78.003 68.786,78.006 68.784,78.014 68.784,78.021 68.786,78.026 68.787,78.028 68.791,78.033 68.795,78.032 68.798,78.03 68.799,78.027 68.802,78.022
  region: 69.295,78.352 69.297,78.35 69.296,78.341 69.294,78.34 69.287,78.341 69.285,78.346 69.286,78.352 69.291,78.354 69.294,78.353
  region: 68.96,78.192 68.961,78.213 68.96,78.222 68.959,78.224 68.96,78.228 68.962,78.232 68.967,78.24 68.968,78.247 68.969,78.25 68.97,78.254 68.97,78.266 68.971,78.27 68.974,78.273 68.981,78.272 68.983,78.27 68.982,78.258 68.981,78.255 68.982,78.244 68.984,78.238 68.985,78.219 68.986,78.216 68.985,78.213 68.984,78.208 68.983,78.198 68.984,78.195 68.983,78.185 68.981,78.182 68.977,78.181 68.971,78.182 68.968,78.184 68.966,78.185 68.96,78.19 68.96,78.191
  region: 67.528,78.149 67.529,78.167 67.53,78.134 67.529,78.133 67.528,78.138 67.528,78.148
  region: 68.391,77.45 68.394,77.451 68.395,77.449 68.393,77.447 68.39,77.448 68.39,77.449 68.39,77.45
  region: 67.558,77.858 67.561,77.851 67.562,77.843 67.565,77.838 67.569,77.84 67.576,77.839 67.577,77.841 67.582,77.843 67.586,77.849 67.588,77.85 67.589,77.845 67.588,77.841 67.587,77.838 67.586,77.829 67.583,77.826 67.582,77.822 67.58,77.816 67.576,77.81 67.575,77.797 67.574,77.792 67.573,77.777 67.571,77.778 67.569,77.784 67.568,77.786 67.566,77.787 67.561,77.79 67.559,77.8 67.553,77.812 67.553,77.813 67.551,77.816 67.545,77.829 67.544,77.837 67.546,77.842 67.545,77.85 67.547,77.852 67.553,77.855 67.555,77.859 hole: 67.577,77.834 67.574,77.834 67.574,77.829 67.575,77.829 67.579,77.83 67.58,77.832
  region: 67.823,77.348 67.833,77.347 67.835,77.344 67.836,77.34 67.836,77.337 67.833,77.336 67.825,77.34 67.823,77.342 67.821,77.343 67.819,77.345 67.82,77.347 67.822,77.348
  region: 68.184,77.533 68.175,77.53 68.17,77.531 68.167,77.533 68.168,77.549 68.171,77.555 68.177,77.566 68.181,77.571 68.183,77.574 68.186,77.576 68.19,77.572 68.191,77.564 68.192,77.56 68.193,77.55 68.194,77.547 68.193,77.54 68.19,77.537 68.188,77.536 68.185,77.534
  region: 68.789,77.709 68.79,77.708 68.791,77.707 68.792,77.705 68.794,77.704 68.797,77.702 68.798,77.7 68.8,77.694 68.801,77.668 68.802,77.664 68.803,77.657 68.809,77.636 68.81,77.631 68.813,77.625 68.808,77.615 68.807,77.595 68.806,77.592 68.805,77.582 68.804,77.56 68.805,77.557 68.804,77.55 68.802,77.545 68.803,77.543 68.806,77.54 68.807,77.532 68.806,77.528 68.803,77.525 68.801,77.524 68.792,77.52 68.781,77.521 68.775,77.526 68.773,77.53 68.778,77.536 68.775,77.538 68.773,77.54 68.774,77.545 68.775,77.546 68.777,77.558 68.778,77.564 68.78,77.569 68.778,77.582 68.781,77.591 68.782,77.598 68.781,77.619 68.78,77.622 68.778,77.629 68.78,77.632 68.778,77.639 68.776,77.644 68.776,77.668 68.778,77.673 68.78,77.677 68.783,77.68 68.784,77.69 68.785,77.704 68.784,77.705 68.786,77.71 hole: 68.79,77.537 68.789,77.537 68.784,77.536 68.784,77.535 68.785,77.533 68.791,77.532 68.793,77.533 68.793,77.536
  region: 67.679,77.726 67.675,77.728 67.67,77.733 67.669,77.735 67.665,77.738 67.66,77.742 67.659,77.743 67.655,77.748 67.65,77.751 67.648,77.753 67.647,77.76 67.648,77.766 67.643,77.77 67.642,77.771 67.639,77.778 67.64,77.792 67.642,77.802 67.644,77.802 67.647,77.8 67.646,77.788 67.648,77.789 67.649,77.791 67.652,77.792 67.659,77.786 67.661,77.784 67.665,77.783 67.679,77.782 67.684,77.777 67.687,77.77 67.689,77.765 67.692,77.758 67.693,77.754 67.694,77.746 67.698,77.737 67.697,77.733 67.695,77.731 67.693,77.73 67.687,77.726 67.679,77.726
  region: 68.808,78.933 68.812,78.934 68.818,78.935 68.821,78.936 68.824,78.935 68.83,78.932 68.83,78.931 68.835,78.93 68.838,78.935 68.841,78.941 68.843,78.942 68.847,78.943 68.852,78.94 68.854,78.936 68.85,78.933 68.847,78.931 68.846,78.927 68.845,78.912 68.847,78.91 68.848,78.906 68.848,78.897 68.847,78.892 68.847,78.886 68.848,78.885 68.844,78.878 68.843,78.872 68.842,78.864 68.843,78.863 68.842,78.86 68.843,78.855 68.842,78.851 68.841,78.845 68.837,78.839 68.836,78.828 68.837,78.815 68.838,78.812 68.839,78.808 68.838,78.804 68.833,78.8 68.83,78.799 68.825,78.803 68.821,78.811 68.819,78.813 68.818,78.815 68.814,78.825 68.811,78.832 68.813,78.844 68.814,78.847 68.815,78.851 68.814,78.868 68.809,78.875 68.808,78.879 68.803,78.886 68.802,78.889 68.8,78.89 68.799,78.893 68.8,78.898 68.799,78.899 68.802,78.902 68.803,78.909 68.804,78.912 68.805,78.915 68.804,78.916 68.807,78.919 68.807,78.921 68.8,78.924 68.799,78.927 68.8,78.929 68.801,78.931 68.807,78.933
  region: 67.529,77.775 67.53,77.768 67.53,77.731 67.53,77.727 67.531,77.724 67.532,77.693 67.533,77.69 67.532,77.544 67.531,77.543 67.532,77.54 67.531,77.529 67.53,77.487 67.529,77.486 67.528,77.491 67.526,77.547 67.525,77.62 67.524,77.632 67.525,77.636 67.525,77.654 67.528,77.783 67.527,77.786 67.525,77.861 67.525,77.889 67.524,77.892 67.523,77.975 67.524,77.978 67.525,77.992 67.528,77.998 67.53,77.997 67.536,77.985 67.538,77.985 67.543,77.987 67.547,77.986 67.549,77.984 67.552,77.983 67.556,77.978 67.557,77.974 67.558,77.967 67.557,77.951 67.556,77.948 67.554,77.935 67.553,77.931 67.552,77.92 67.551,77.916 67.545,77.901 67.544,77.898 67.541,77.899 67.54,77.903 67.538,77.904 67.538,77.906 67.537,77.901 67.535,77.895 67.534,77.888 67.533,77.817 67.532,77.813 67.531,77.79 67.53,77.786 67.529,77.776
  region: 67.807,77.665 67.809,77.674 67.81,77.676 67.815,77.675 67.817,77.669 67.818,77.667 67.82,77.666 67.823,77.665 67.827,77.664 67.829,77.662 67.829,77.661 67.832,77.66 67.833,77.658 67.835,77.651 67.836,77.643 67.838,77.63 67.837,77.607 67.83,77.591 67.829,77.587 67.824,77.581 67.822,77.58 67.82,77.578 67.818,77.577 67.816,77.574 67.811,77.573 67.806,77.574 67.802,77.578 67.8,77.583 67.799,77.586 67.796,77.588 67.791,77.591 67.79,77.596 67.791,77.62 67.79,77.634 67.793,77.638 67.796,77.639 67.799,77.642 67.802,77.653 67.804,77.659 67.807,77.664
  region: 68.941,77.85 68.943,77.85 68.946,77.847 68.948,77.842 68.949,77.838 68.949,77.833 68.948,77.827 68.947,77.822 68.945,77.819 68.942,77.818 68.939,77.821 68.938,77.825 68.939,77.845 68.941,77.849
  region: 68.965,78.809 68.965,78.819 68.967,78.825 68.972,78.834 68.974,78.833 68.977,78.826 68.979,78.82 68.98,78.813 68.979,78.809 68.978,78.802 68.975,78.799 68.972,78.798 68.968,78.801 68.967,78.802 68.966,78.809
  region: 68.107,77.397 68.113,77.398 68.124,77.396 68.125,77.393 68.123,77.391 68.119,77.39 68.108,77.391 68.106,77.394 68.107,77.396
  region: 68.105,77.441 68.11,77.438 68.112,77.432 68.115,77.427 68.121,77.421 68.123,77.421 68.124,77.417 68.119,77.412 68.115,77.407 68.103,77.406 68.1,77.407 68.098,77.408 68.096,77.41 68.097,77.416 68.099,77.422 68.1,77.441 68.104,77.441
  region: 67.588,77.383 67.586,77.374 67.584,77.368 67.583,77.364 67.582,77.356 67.581,77.352 67.579,77.347 67.578,77.345 67.579,77.342 67.581,77.333 67.58,77.323 67.579,77.319 67.58,77.309 67.584,77.308 67.588,77.306 67.59,77.304 67.589,77.299 67.591,77.298 67.595,77.297 67.601,77.296 67.603,77.294 67.602,77.291 67.601,77.289 67.595,77.29 67.592,77.293 67.588,77.294 67.584,77.293 67.581,77.291 67.58,77.289 67.577,77.283 67.574,77.281 67.57,77.28 67.564,77.281 67.563,77.282 67.566,77.29 67.565,77.292 67.563,77.293 67.561,77.294 67.56,77.296 67.561,77.304 67.563,77.309 67.562,77.318 67.561,77.322 67.56,77.339 67.56,77.345 67.557,77.354 67.556,77.358 67.555,77.372 67.553,77.376 67.554,77.379 67.555,77.397 67.556,77.4 67.558,77.406 67.562,77.411 67.566,77.412 67.574,77.411 67.577,77.409 67.585,77.405 67.588,77.398 67.589,77.391 67.588,77.388 67.588,77.383
  region: 65.684,79.842 65.683,79.847 65.684,79.853 65.685,79.842
  region: 69.514,78.562 69.515,78.494 69.514,78.374 69.512,78.371 69.51,78.379 69.509,78.406 69.51,78.543 69.511,78.554 69.512,78.565 69.511,78.568 69.51,78.578 69.511,78.587 69.51,78.591 69.51,78.605 69.51,78.633 69.511,78.636 69.512,78.651 69.512,78.652 69.514,78.642 69.515,78.63 69.515,78.591 69.514,78.587 69.514,78.563
  region: 67.741,77.99 67.744,77.992 67.745,77.994 67.747,77.997 67.752,77.998 67.755,77.997 67.758,77.994 67.759,77.992 67.774,77.991 67.777,77.988 67.778,77.986 67.78,77.981 67.779,77.973 67.783,77.969 67.785,77.964 67.784,77.955 67.783,77.953 67.78,77.952 67.779,77.951 67.78,77.927 67.78,77.912 67.779,77.9 67.775,77.892 67.772,77.885 67.769,77.879 67.768,77.869 67.762,77.868 67.757,77.87 67.739,77.869 67.736,77.871 67.735,77.875 67.736,77.878 67.739,77.881 67.738,77.883 67.737,77.883 67.731,77.88 67.728,77.881 67.725,77.891 67.722,77.896 67.719,77.9 67.717,77.901 67.711,77.906 67.708,77.914 67.709,77.932 67.715,77.935 67.718,77.938 67.717,77.944 67.714,77.948 67.712,77.952 67.716,77.959 67.719,77.962 67.721,77.969 67.722,77.975 67.725,77.976 67.73,77.979 67.733,77.982 67.734,77.984 67.738,77.987 67.74,77.989 67.741,77.989
  region: 69.514,77.94 69.515,77.917 69.514,77.779 69.512,77.779 69.51,77.786 69.511,77.936 69.512,77.939 69.511,77.982 69.51,78.06 69.511,78.064 69.512,78.066 69.514,78.061 69.515,78.054 69.515,78.027 69.515,77.978 69.514,77.975 69.515,77.968 69.514,77.944 69.514,77.941
  region: 67.531,78.599 67.53,78.584 67.529,78.584 67.528,78.588 67.529,78.611 67.53,78.602 67.531,78.6
  region: 501 vertices and 2 holes, not listed, extent 68.6,77.484 68.783,78.925
  region: 69.128,77.994 69.127,77.984 69.128,77.98 69.129,77.969 69.13,77.952 69.131,77.949 69.132,77.935 69.131,77.903 69.13,77.9 69.128,77.887 69.127,77.882 69.127,77.878 69.128,77.875 69.127,77.867 69.123,77.859 69.122,77.846 69.112,77.827 69.107,77.829 69.106,77.832 69.101,77.843 69.1,77.851 69.099,77.868 69.098,77.871 69.099,77.887 69.1,77.89 69.099,77.91 69.1,77.919 69.101,77.931 69.1,77.934 69.101,77.944 69.103,77.95 69.104,77.954 69.103,77.971 69.104,77.975 69.103,78.001 69.102,78.004 69.102,78.024 69.104,78.033 69.103,78.056 69.104,78.084 69.105,78.087 69.106,78.107 69.115,78.116 69.119,78.115 69.122,78.112 69.124,78.106 69.126,78.099 69.127,78.043 69.128,78.034 69.127,78.031 69.128,77.995
Bottom Layer:
  pour cut-out: 127.508,42.926 138.811,42.926 138.811,45.085 127.508,45.085
  pour cut-out: 94.996,41.077 108.839,41.077 108.839,44.76 94.996,44.76
  pour cut-out: 61.849,43.815 69.215,43.815 69.215,45.593 61.849,45.593
  pour cut-out: 71.628,53.848 71.628,45.339 75.311,45.339 75.311,53.848
  pour cut-out: 127.133,91.948 127.133,87.249 136.652,87.249 136.652,92.075
  pour cut-out: 73.025,105.791 73.025,100.947 82.169,100.947 82.169,105.791
  pour cut-out: 48.768,101.219 48.768,104.902 61.976,104.902 61.976,101.219
  pour cut-out: 59.944,92.202 59.944,86.614 69.342,86.614 69.342,92.202
  pour cut-out: 94.361,92.329 94.361,85.344 104.648,85.344 104.648,92.347
  pour cut-out: 153.162,81.661 153.162,89.408 145.923,89.408 145.923,81.661
  pour cut-out: 59.436,21.971 54.864,21.971 54.864,12.065 59.563,12.065

## Silkscreen, mask and mechanical layers (free items; w line width, h text height)
Top Overlay:
  text "24V power source" at 33.655,105.029 h1.52 r270
  text "5V_backup" at 164.592,94.996 h1.52 r180
  text "24V In_buck" at 84.455,90.424 h1.52 r180
  text "12V out_buck" at 121.285,90.424 h1.52 r180
  text "5V out_buck" at 152.4,90.424 h1.52 r180
  text "24V_backup" at 22.352,79.121 h1.52 r270
  text "R-pi_5V" at 155.321,78.74 h1.52
  text "Switch_5V" at 154.559,64.008 h1.52
  text "Transceiver" at 22.352,60.833 h1.52 r270
  text "MD_1" at 13.081,23.622 h1.52
  text "MD_2" at 33.655,23.622 h1.52
  text "MoB" at 54.737,23.622 h1.52
  text "12V_backup" at 155.702,21.336 h1.52 r90
  text "Video_Encoder" at 121.412,18.669 h1.52
  text "Cams_1" at 76.581,18.542 h1.52
  text "Cams_2" at 91.218,18.542 h1.52
  text "Cams_3" at 106.363,18.542 h1.52
  text "Jetson" at 143.51,18.288 h1.52
Bottom Overlay:
  drawing of 61 lines, arcs and shapes, not listed
  text "With great power comes great responsibility" at 69.215,108.204 h1.52
  text "Sanidhya_Singhal" at 166.497,2.921 h1.52
Mechanical 1:
  lines w0.254: 0.887,108.256 0.887,3.554 ccw(c4.443,3.681) 4.259,0.127 167.894,0.127 ; 0.891,108.261 cw(c4.445,108.077) 4.318,111.633 167.826,111.633 cw(c167.642,108.079) 171.198,108.206 ; 167.769,0.129 ccw(c167.642,3.685) 171.196,3.502 171.196,108.331

## Text inside footprints (layer, text, board x,y; h text height)
J12: Top Overlay "-" at 22.733,82.222 h1.52 r270; Top Overlay "+" at 23.241,106.222 h1.52 r270